# Altium PCB FPv1.3.5.PcbDoc (part 6 of 9)
Units mil, origin at the board's own origin, x right, y up, seen from the top; angles counter-clockwise.
Board outline 3200 x 2100 mil, 4 copper layers (Top Layer, GROUND PLANE, POWER PLANE, Bottom Layer); 98 components, 183 nets, 614 pads, 312 vias.
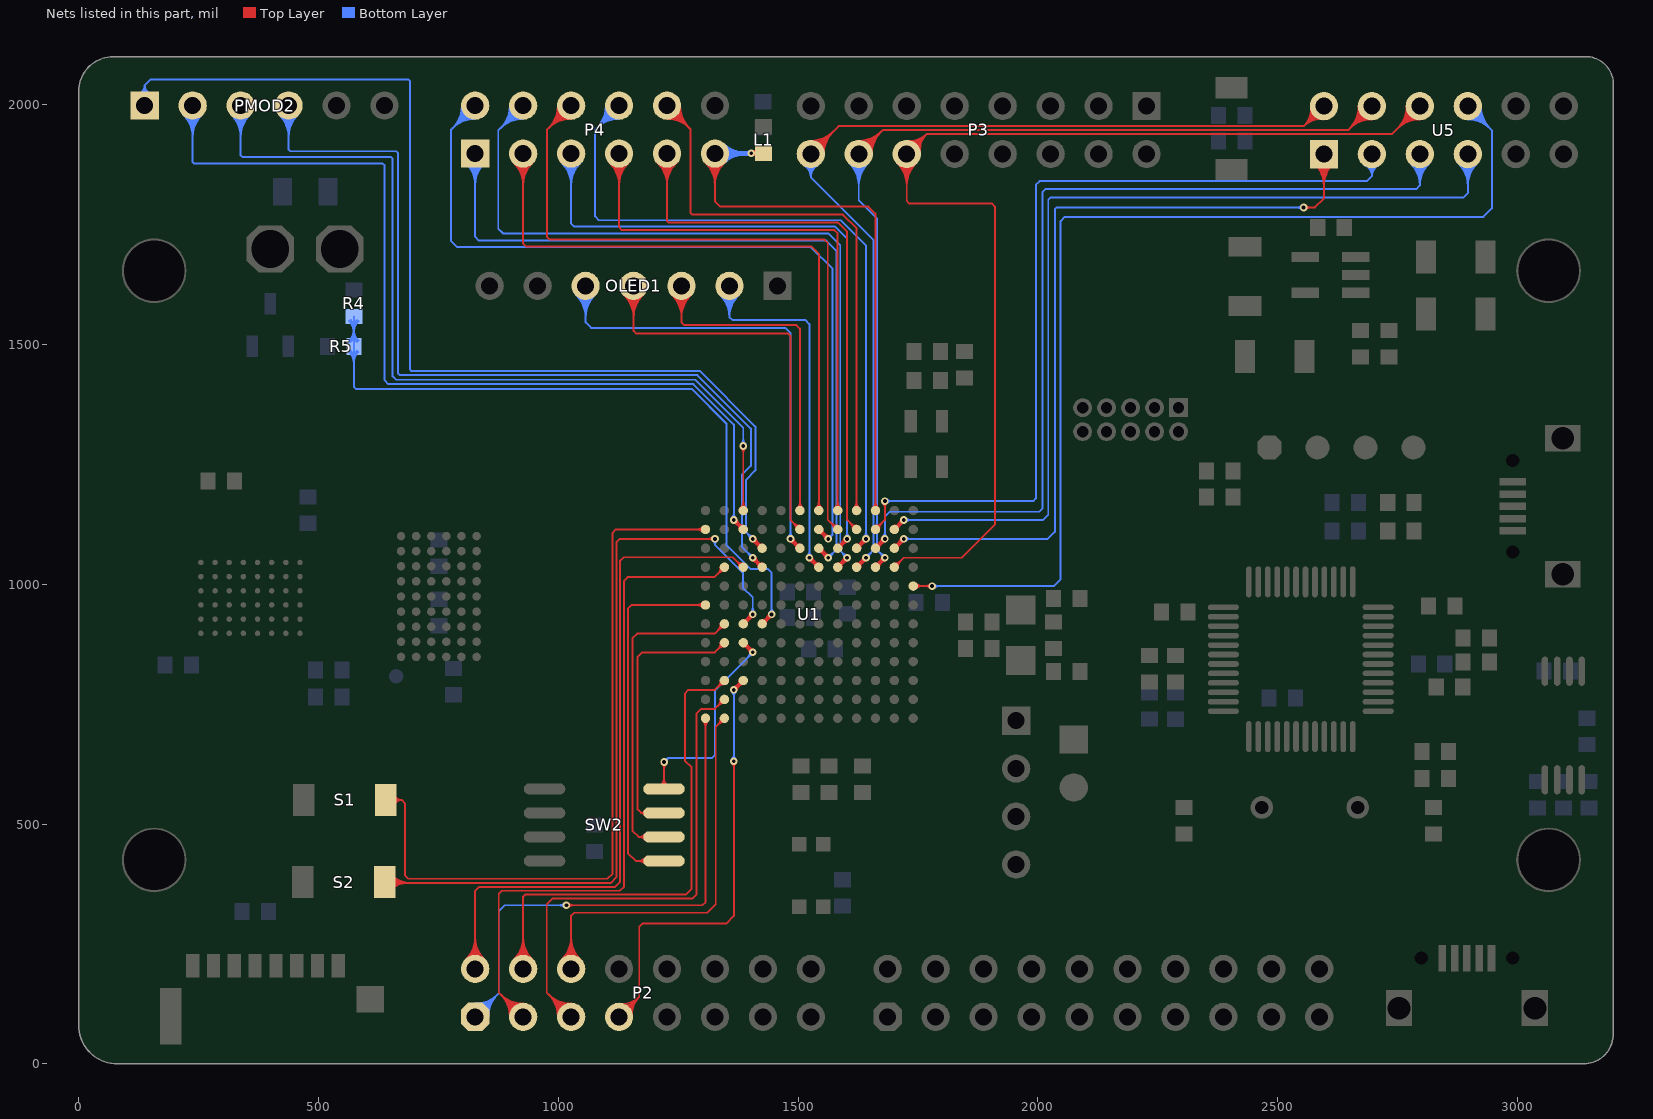
[diagram p8: the nets of this part, all layers, seen from the top]

## Via types
v1: diameter 15.87, hole 7.87, Top Layer to Bottom Layer, tented both sides, 261 vias
v2: diameter 19.8, hole 11.81, Top Layer to Bottom Layer, tented both sides, 25 vias
v3: diameter 23.62, hole 15.75, Top Layer to Bottom Layer, tented both sides, 11 vias
v4: diameter 20, hole 13, Top Layer to Bottom Layer, tented both sides, 5 vias
v5: diameter 27.68, hole 15.75, Top Layer to Bottom Layer, tented both sides, 3 vias
v6: diameter 23.74, hole 15.75, Top Layer to Bottom Layer, tented both sides, 2 vias
v7: diameter 19.8, hole 9.84, Top Layer to Bottom Layer, tented both sides, 2 vias
v8: diameter 23.62, hole 9.45, Top Layer to Bottom Layer, tented both sides, 1 vias
v9: diameter 17.24, hole 9.06, Top Layer to Bottom Layer, tented both sides, 1 vias
v10: diameter 23.74, hole 11.81, Top Layer to Bottom Layer, tented both sides, 1 vias

## Nets (pads, with @x,y where several pads share a name; then routed paths per layer and width w, separated by ;. In a path a pad name is that pad's centre, name@x,y a point inside that pad or via, vN(x,y) a via of type N, cw(c..) or ccw(c..) an arc to the next point about the centre after c; other vN are vias at no path point) (continued)
PTA5: U1.M8 U5.8 | length 2605.6
  Top Layer w4: U1.M8@1740.16,996.06 v1(1779.53,996.06) ; U1.M8@1745.7,990.52 cw(c1759.09,977.13) 1759.09,996.06 cw(c1759.09,1015) U1.M8@1745.7,1001.61 ; v1@1775.33,991.87 ccw(c1765.2,981.74) 1765.2,996.06 ccw(c1765.2,1010.39) v1@1775.33,1000.26
  Bottom Layer w4: v1(1779.53,996.06) 2033.06,996.06 2047.24,1010.24 2047.24,1756.89 2056.1,1765.75 2929.13,1765.75 2946.85,1783.46 2946.85,1946.26 U5.8@2896.46,1996.65 ; v1@1783.72,991.87 cw(c1793.85,981.74) 1793.85,996.06 cw(c1793.85,1010.39) v1@1783.72,1000.26 ; U5.8@2896.46,1969.13 cw(c2896.46,1902.67) 2943.45,1949.66 cw(c2990.44,1996.65) U5.8@2923.98,1996.65 ; U5.8@2896.46,1973.13 cw(c2896.46,1916.33) 2936.62,1956.49 cw(c2976.78,1996.65) U5.8@2919.98,1996.65 ; U5.8@2896.46,1977.13 cw(c2896.46,1929.98) 2929.79,1963.32 cw(c2963.13,1996.65) U5.8@2915.98,1996.65 ; U5.8@2896.46,1981.13 cw(c2896.46,1943.64) 2922.96,1970.15 cw(c2949.47,1996.65) U5.8@2911.98,1996.65
PTA11: P3.12 U1.L9 U5.6 | length 3262.8
  Top Layer w4: U1.L9@1700.79,1035.43 1720.47,1055.12 1841.54,1055.12 1910.43,1124.02 1910.43,1787.4 1904.53,1793.31 1732.28,1793.31 1726.61,1798.98 P3.12@1726.61,1897.05 1768.54,1938.98 2738.78,1938.98 U5.6@2796.46,1996.65 ; U1.L9@1700.79,1043.28 ccw(c1700.79,1062.21) 1714.18,1048.82 ccw(c1727.56,1035.43) U1.L9@1708.63,1035.43 ; P3.12@1707.15,1877.58 cw(c1660.16,1830.59) 1726.61,1830.59 cw(c1793.07,1830.59) P3.12@1746.08,1877.58 ; P3.12@1709.98,1880.41 cw(c1669.81,1840.25) 1726.61,1840.25 cw(c1783.41,1840.25) P3.12@1743.25,1880.41 ; P3.12@1712.81,1883.24 cw(c1679.47,1849.9) 1726.61,1849.9 cw(c1773.76,1849.9) P3.12@1740.42,1883.24 ; P3.12@1715.63,1886.07 cw(c1689.13,1859.56) 1726.61,1859.56 cw(c1764.1,1859.56) P3.12@1737.59,1886.07 ; P3.12@1727.92,1912.52 ccw(c1730.28,1940.68) 1750.26,1920.7 ccw(c1770.24,1900.72) P3.12@1742.09,1898.35 ; P3.12@1728.25,1916.51 ccw(c1731.23,1951.92) 1756.36,1926.79 ccw(c1781.48,1901.66) P3.12@1746.07,1898.68 ; P3.12@1728.59,1920.49 ccw(c1732.17,1963.16) 1762.45,1932.88 ccw(c1792.72,1902.61) P3.12@1750.06,1899.02 ; P3.12@1728.92,1924.48 ccw(c1733.12,1974.4) 1768.54,1938.97 ccw(c1803.96,1903.55) P3.12@1754.04,1899.35 ; U5.6@2768.93,1996.65 cw(c2702.47,1996.65) 2749.46,1949.66 cw(c2796.46,1902.67) U5.6@2796.46,1969.13 ; U5.6@2772.93,1996.65 cw(c2716.13,1996.65) 2756.29,1956.49 cw(c2796.46,1916.33) U5.6@2796.46,1973.13 ; U5.6@2776.93,1996.65 cw(c2729.79,1996.65) 2763.12,1963.32 cw(c2796.46,1929.98) U5.6@2796.46,1977.13 ; U5.6@2780.93,1996.65 cw(c2743.44,1996.65) 2769.95,1970.15 cw(c2796.46,1943.64) U5.6@2796.46,1981.13
PTA12: P3.14 U1.K9 U5.4 | length 3143.7
  Top Layer w4: P3.14@1626.61,1897.05 1676.54,1946.98 2646.78,1946.98 U5.4@2696.46,1996.65 ; P3.14@1626.61,1912.57 ccw(c1626.61,1950.06) 1653.12,1923.55 ccw(c1679.63,1897.05) P3.14@1642.14,1897.05 ; P3.14@1626.61,1916.57 ccw(c1626.61,1963.72) 1659.95,1930.38 ccw(c1693.29,1897.05) P3.14@1646.14,1897.05 ; P3.14@1626.61,1920.57 ccw(c1626.61,1977.38) 1666.78,1937.21 ccw(c1706.94,1897.05) P3.14@1650.14,1897.05 ; P3.14@1626.61,1924.57 ccw(c1626.61,1991.03) 1673.61,1944.04 ccw(c1720.6,1897.05) P3.14@1654.14,1897.05 ; U1.K9@1661.42,1035.43 v1(1681.1,1055.12) ; U1.K9@1661.42,1043.28 ccw(c1661.42,1062.21) 1674.81,1048.82 ccw(c1688.19,1035.43) U1.K9@1669.26,1035.43 ; U1.K9@1665.17,1043.26 ccw(c1654.26,1062.15) v1@1675.36,1056.62 ; U1.K9@1669.24,1039.18 cw(c1688.14,1028.27) v1@1682.61,1049.38 ; 1673.46,1048.05 ccw(c1667.29,1058.74) v1@1679.23,1055.61 ; 1673.65,1048.16 ccw(c1671.57,1051.77) v1@1675.5,1053.15 ; 1674.03,1047.48 cw(c1684.72,1041.31) v1@1681.59,1053.25 ; 1674.14,1047.67 cw(c1677.75,1045.58) v1@1679.14,1049.52 ; v1@1675.17,1055.12 cw(c1660.85,1055.12) 1670.97,1044.99 cw(c1681.1,1034.86) v1@1681.1,1049.19 ; U5.4@2668.93,1996.65 cw(c2602.47,1996.65) 2649.46,1949.66 cw(c2696.46,1902.67) U5.4@2696.46,1969.13 ; U5.4@2672.93,1996.65 cw(c2616.13,1996.65) 2656.29,1956.49 cw(c2696.46,1916.33) U5.4@2696.46,1973.13 ; U5.4@2676.93,1996.65 cw(c2629.79,1996.65) 2663.12,1963.32 cw(c2696.46,1929.98) U5.4@2696.46,1977.13 ; U5.4@2680.93,1996.65 cw(c2643.44,1996.65) 2669.95,1970.15 cw(c2696.46,1943.64) U5.4@2696.46,1981.13 ; 1674.67,1048.74 cw(c1677.9,1043.15) 1679.57,1049.39 ccw(c1677.9,1043.15) 1674.67,1048.74 ; 1674.73,1048.68 ccw(c1669.14,1051.91) 1675.37,1053.58 cw(c1669.14,1051.91) 1674.73,1048.68
  Bottom Layer w4: P3.14@1607.15,1877.58 cw(c1560.16,1830.59) 1626.61,1830.59 cw(c1693.07,1830.59) P3.14@1646.08,1877.58 ; P3.14@1609.98,1880.41 cw(c1569.81,1840.25) 1626.61,1840.25 cw(c1683.41,1840.25) P3.14@1643.25,1880.41 ; P3.14@1612.81,1883.24 cw(c1579.47,1849.9) 1626.61,1849.9 cw(c1673.76,1849.9) P3.14@1640.42,1883.24 ; P3.14@1615.63,1886.07 cw(c1589.13,1859.56) 1626.61,1859.56 cw(c1664.1,1859.56) P3.14@1637.59,1886.07 ; P3.14@1626.61,1897.05 1626.61,1800.2 1665,1761.81 1665,1071.22 v1(1681.1,1055.12) ; v1@1675.17,1055.12 ccw(c1660.85,1055.12) 1670.97,1065.25 ccw(c1681.1,1075.37) v1@1681.1,1061.05
PTA13: P3.16 U1.J9 U5.2 | length 2952.5
  Top Layer w4: P3.16@1526.61,1897.05 1584.54,1954.98 2554.78,1954.98 ; P3.16@1526.61,1912.57 ccw(c1526.61,1950.06) 1553.12,1923.55 ccw(c1579.63,1897.05) P3.16@1542.14,1897.05 ; P3.16@1526.61,1916.57 ccw(c1526.61,1963.72) 1559.95,1930.38 ccw(c1593.29,1897.05) P3.16@1546.14,1897.05 ; P3.16@1526.61,1920.57 ccw(c1526.61,1977.38) 1566.78,1937.21 ccw(c1606.94,1897.05) P3.16@1550.14,1897.05 ; P3.16@1526.61,1924.57 ccw(c1526.61,1991.03) 1573.61,1944.04 ccw(c1620.6,1897.05) P3.16@1554.14,1897.05 ; U1.J9@1622.05,1035.43 v1(1641.73,1055.12) ; U1.J9@1622.05,1043.28 ccw(c1622.05,1062.21) 1635.44,1048.82 ccw(c1648.82,1035.43) U1.J9@1629.89,1035.43 ; U1.J9@1625.8,1043.26 ccw(c1614.89,1062.15) v1@1635.99,1056.62 ; U1.J9@1629.87,1039.18 cw(c1648.77,1028.27) v1@1643.24,1049.38 ; 1634.09,1048.05 ccw(c1627.92,1058.74) v1@1639.86,1055.61 ; 1634.28,1048.16 ccw(c1632.2,1051.77) v1@1636.13,1053.15 ; 1634.66,1047.48 cw(c1645.35,1041.31) v1@1642.22,1053.25 ; 1634.77,1047.67 cw(c1638.38,1045.58) v1@1639.77,1049.52 ; v1@1635.8,1055.12 cw(c1621.48,1055.12) 1631.6,1044.99 cw(c1641.73,1034.86) v1@1641.73,1049.19 ; U5.2@2569.04,1994.22 cw(c2519.9,1989.86) 2554.78,1954.98 ; U5.2@2573.02,1994.57 cw(c2531.02,1990.85) 2560.84,1961.03 cw(c2590.65,1931.22) U5.2@2594.38,1973.22 ; U5.2@2577.01,1994.93 cw(c2542.15,1991.83) 2566.89,1967.09 cw(c2591.64,1942.35) U5.2@2594.73,1977.2 ; U5.2@2580.99,1995.28 cw(c2553.27,1992.82) 2572.95,1973.15 cw(c2592.62,1953.47) U5.2@2595.08,1981.19 ; U5.2@2594.02,1969.23 ccw(c2589.66,1920.1) 2554.78,1954.98 ; U5.2@2596.46,1996.65 2554.78,1954.98 ; 1635.3,1048.74 cw(c1638.53,1043.15) 1640.2,1049.39 ccw(c1638.53,1043.15) 1635.3,1048.74 ; 1635.36,1048.68 ccw(c1629.77,1051.91) 1636,1053.58 cw(c1629.77,1051.91) 1635.36,1048.68
  Bottom Layer w4: P3.16@1512.43,1873.45 cw(c1497.37,1848.39) 1526.61,1848.39 ; P3.16@1514.49,1876.88 cw(c1501.62,1855.46) 1526.61,1855.46 cw(c1551.61,1855.46) P3.16@1538.73,1876.88 ; P3.16@1516.56,1880.31 cw(c1505.87,1862.53) 1526.61,1862.53 cw(c1547.36,1862.53) P3.16@1536.67,1880.31 ; P3.16@1526.61,1897.05 1526.61,1848.39 ; P3.16@1540.79,1873.45 ccw(c1555.86,1848.39) 1526.61,1848.39 ; v1(1641.73,1055.12) 1657,1070.39 1657,1718 1526.61,1848.39 ; v1@1641.73,1061.05 ccw(c1641.73,1075.37) 1651.86,1065.25 ccw(c1661.99,1055.12) v1@1647.67,1055.12
PTA14: U1.L10 U5.1 | length 2216.2
  Top Layer w4: U1.L10@1700.79,1074.8 v1(1720.47,1094.49) ; U1.L10@1700.79,1082.65 ccw(c1700.79,1101.58) 1714.18,1088.19 ccw(c1727.56,1074.8) U1.L10@1708.63,1074.8 ; U1.L10@1704.54,1082.63 ccw(c1693.63,1101.52) v1@1714.73,1095.99 ; U1.L10@1708.61,1078.55 cw(c1727.51,1067.64) v1@1721.98,1088.75 ; 1712.83,1087.42 ccw(c1706.66,1098.11) v1@1718.6,1094.98 ; 1713.02,1087.53 ccw(c1710.94,1091.14) v1@1714.87,1092.52 ; 1713.4,1086.85 cw(c1724.09,1080.68) v1@1720.96,1092.62 ; 1713.51,1087.04 cw(c1717.12,1084.95) v1@1718.51,1088.89 ; v1@1714.54,1094.49 cw(c1700.22,1094.49) 1710.34,1084.36 cw(c1720.47,1074.23) v1@1720.47,1088.56 ; v1(2554.13,1785.43) 2577.76,1785.43 2596.46,1804.13 U5.1@2596.46,1896.65 ; v1@2558.33,1781.24 cw(c2568.46,1771.11) 2568.46,1785.43 cw(c2568.46,1799.76) v1@2558.33,1789.63 ; U5.1@2576.99,1877.19 cw(c2530,1830.2) 2596.46,1830.2 cw(c2662.91,1830.2) U5.1@2615.92,1877.19 ; U5.1@2579.82,1880.02 cw(c2539.66,1839.85) 2596.46,1839.85 cw(c2653.26,1839.85) U5.1@2613.09,1880.02 ; U5.1@2582.65,1882.85 cw(c2549.31,1849.51) 2596.46,1849.51 cw(c2643.6,1849.51) U5.1@2610.26,1882.85 ; U5.1@2585.48,1885.67 cw(c2558.97,1859.17) 2596.46,1859.17 cw(c2633.94,1859.17) U5.1@2607.44,1885.67 ; 1714.04,1088.11 cw(c1717.27,1082.52) 1718.94,1088.76 ccw(c1717.27,1082.52) 1714.04,1088.11 ; 1714.1,1088.06 ccw(c1708.51,1091.28) 1714.74,1092.95 cw(c1708.51,1091.28) 1714.1,1088.06
  Bottom Layer w4: v1(1720.47,1094.49) 2020.67,1094.49 2035.43,1109.25 2035.43,1781.43 2039.43,1785.43 v1(2554.13,1785.43) ; v1@1724.67,1090.29 cw(c1734.8,1080.16) 1734.8,1094.49 cw(c1734.8,1108.81) v1@1724.67,1098.68 ; v1@2549.94,1781.24 ccw(c2539.81,1771.11) 2539.81,1785.43 ccw(c2539.81,1799.76) v1@2549.94,1789.63
PTA15: U1.L11 U5.7 | length 2439.4
  Top Layer w4: U1.L11@1700.79,1114.17 v1(1720.47,1133.86) ; U1.L11@1700.79,1122.02 ccw(c1700.79,1140.95) 1714.18,1127.56 ccw(c1727.56,1114.17) U1.L11@1708.63,1114.17 ; U1.L11@1704.54,1122 ccw(c1693.63,1140.89) v1@1714.73,1135.36 ; U1.L11@1708.61,1117.92 cw(c1727.51,1107.01) v1@1721.98,1128.12 ; 1712.83,1126.79 ccw(c1706.66,1137.48) v1@1718.6,1134.35 ; 1713.02,1126.9 ccw(c1710.94,1130.51) v1@1714.87,1131.89 ; 1713.4,1126.22 cw(c1724.09,1120.05) v1@1720.96,1131.99 ; 1713.51,1126.41 cw(c1717.12,1124.32) v1@1718.51,1128.26 ; v1@1714.54,1133.86 cw(c1700.22,1133.86) 1710.34,1123.73 cw(c1720.47,1113.6) v1@1720.47,1127.93 ; 1714.04,1127.48 cw(c1717.27,1121.89) 1718.94,1128.13 ccw(c1717.27,1121.89) 1714.04,1127.48 ; 1714.1,1127.43 ccw(c1708.51,1130.65) 1714.74,1132.32 cw(c1708.51,1130.65) 1714.1,1127.43
  Bottom Layer w4: v1(1720.47,1133.86) 2010.86,1133.86 2021.65,1144.65 2021.65,1801.65 2026.1,1806.1 2887.1,1806.1 2896.46,1815.46 U5.7@2896.46,1896.65 ; v1@1724.67,1129.66 cw(c1734.8,1119.53) 1734.8,1133.86 cw(c1734.8,1148.18) v1@1724.67,1138.05 ; U5.7@2876.99,1877.19 cw(c2830,1830.2) 2896.46,1830.2 cw(c2962.91,1830.2) U5.7@2915.92,1877.19 ; U5.7@2879.82,1880.02 cw(c2839.66,1839.85) 2896.46,1839.85 cw(c2953.26,1839.85) U5.7@2913.09,1880.02 ; U5.7@2882.65,1882.85 cw(c2849.31,1849.51) 2896.46,1849.51 cw(c2943.6,1849.51) U5.7@2910.26,1882.85 ; U5.7@2885.48,1885.67 cw(c2858.97,1859.17) 2896.46,1859.17 cw(c2933.94,1859.17) U5.7@2907.44,1885.67
PTA16: U1.K10 U5.5 | length 2405.3
  Top Layer w4: U1.K10@1661.42,1074.8 v1(1681.1,1094.49) ; U1.K10@1661.42,1082.65 ccw(c1661.42,1101.58) 1674.81,1088.19 ccw(c1688.19,1074.8) U1.K10@1669.26,1074.8 ; U1.K10@1665.17,1082.63 ccw(c1654.26,1101.52) v1@1675.36,1095.99 ; U1.K10@1669.24,1078.55 cw(c1688.14,1067.64) v1@1682.61,1088.75 ; 1673.46,1087.42 ccw(c1667.29,1098.11) v1@1679.23,1094.98 ; 1673.65,1087.53 ccw(c1671.57,1091.14) v1@1675.5,1092.52 ; 1674.03,1086.85 cw(c1684.72,1080.68) v1@1681.59,1092.62 ; 1674.14,1087.04 cw(c1677.75,1084.95) v1@1679.14,1088.89 ; v1@1675.17,1094.49 cw(c1660.85,1094.49) 1670.97,1084.36 cw(c1681.1,1074.23) v1@1681.1,1088.56 ; 1674.67,1088.11 cw(c1677.9,1082.52) 1679.57,1088.76 ccw(c1677.9,1082.52) 1674.67,1088.11 ; 1674.73,1088.06 ccw(c1669.14,1091.28) 1675.37,1092.95 cw(c1669.14,1091.28) 1674.73,1088.06
  Bottom Layer w4: v1@1676.91,1098.68 ccw(c1666.78,1108.81) 1681.1,1108.81 ccw(c1695.43,1108.81) v1@1685.3,1098.68 ; v1(1681.1,1094.49) 1681.1,1141.1 1691,1151 2003,1151 2010,1158 2010,1818 2015.82,1823.82 2788.82,1823.82 2796.46,1831.46 ; U5.5@2777.26,1876.92 cw(c2733.02,1831.46) 2796.46,1831.46 ; U5.5@2780.05,1879.79 cw(c2742.24,1840.93) 2796.46,1840.93 cw(c2850.67,1840.93) U5.5@2812.86,1879.79 ; U5.5@2782.84,1882.66 cw(c2751.46,1850.41) 2796.46,1850.41 cw(c2841.46,1850.41) U5.5@2810.07,1882.66 ; U5.5@2785.63,1885.52 cw(c2760.67,1859.88) 2796.46,1859.88 cw(c2832.24,1859.88) U5.5@2807.29,1885.52 ; U5.5@2796.46,1896.65 2796.46,1831.46 ; U5.5@2815.65,1876.92 ccw(c2859.89,1831.46) 2796.46,1831.46
PTA17: U1.K11 U5.3 | length 2001
  Top Layer w4: U1.K11@1661.42,1114.17 1681.1,1133.86 v1(1681.1,1173.23) ; U1.K11@1661.42,1122.02 ccw(c1661.42,1140.95) 1674.81,1127.56 ccw(c1688.19,1114.17) U1.K11@1669.26,1114.17 ; v1@1676.91,1169.03 cw(c1666.78,1158.9) 1681.1,1158.9 cw(c1695.43,1158.9) v1@1685.3,1169.03
  Bottom Layer w4: v1(1681.1,1173.23) 1990.23,1173.23 1996.06,1179.06 1996.06,1833.06 2003.55,1840.55 2686.02,1840.55 2696.46,1850.98 ; v1@1685.3,1169.03 cw(c1695.43,1158.9) 1695.43,1173.23 cw(c1695.43,1187.55) v1@1685.3,1177.42 ; U5.3@2683.6,1872.31 cw(c2672.34,1850.99) 2696.46,1850.99 ; U5.3@2685.47,1875.85 cw(c2675.84,1857.62) 2696.46,1857.62 cw(c2717.07,1857.62) U5.3@2707.44,1875.85 ; U5.3@2687.34,1879.39 cw(c2679.35,1864.26) 2696.46,1864.26 cw(c2713.56,1864.26) U5.3@2705.58,1879.39 ; U5.3@2696.46,1896.65 2696.46,1850.98 ; U5.3@2709.31,1872.31 ccw(c2720.57,1850.99) 2696.46,1850.99
PTA24: L1.1 P4.11 U1.K12 | length 1711.7
  Top Layer w4: P4.11@1307.35,1878.37 cw(c1260.35,1831.38) 1326.81,1831.38 cw(c1393.27,1831.38) P4.11@1346.28,1878.37 ; P4.11@1310.17,1881.2 cw(c1270.01,1841.03) 1326.81,1841.03 cw(c1383.61,1841.03) P4.11@1343.45,1881.2 ; P4.11@1313,1884.03 cw(c1279.67,1850.69) 1326.81,1850.69 cw(c1373.95,1850.69) P4.11@1340.62,1884.03 ; P4.11@1315.83,1886.85 cw(c1289.32,1860.35) 1326.81,1860.35 cw(c1364.3,1860.35) P4.11@1337.79,1886.85 ; P4.11@1326.81,1897.83 1326.81,1798.19 1337.6,1787.4 1646.65,1787.4 1661.42,1772.64 U1.K12@1661.42,1153.54 ; U1.K12@1655.87,1159.09 ccw(c1642.48,1172.48) 1661.42,1172.48 ccw(c1680.35,1172.48) U1.K12@1666.96,1159.09
  Top Layer w10: L1.1@1418.08,1891.56 ccw(c1402.56,1878.04) v1(1402.56,1898.62) ; L1.1@1418.08,1905.68 cw(c1402.56,1919.2) v1(1402.56,1898.62) ; L1.1@1428.15,1898.62 v1(1402.56,1898.62)
  Bottom Layer w10: P4.11@1326.81,1897.83 v1@1401.77,1897.83 ; P4.11@1337.08,1887.56 cw(c1361.88,1862.76) 1361.88,1897.83 cw(c1361.88,1932.91) P4.11@1337.08,1908.11 ; P4.11@1344.15,1880.49 cw(c1386.02,1838.62) 1386.02,1897.83 cw(c1386.02,1957.05) P4.11@1344.15,1915.18 ; 1393.58,1897.83 ccw(c1393.58,1907.61) v1@1400.49,1900.7
PTA25: P4.10 U1.J12 | length 1548.2
  Top Layer w4: P4.10@1226.81,1970.31 cw(c1226.81,1903.85) 1273.8,1950.84 cw(c1320.8,1997.83) P4.10@1254.34,1997.83 ; P4.10@1226.81,1974.31 cw(c1226.81,1917.51) 1266.97,1957.67 cw(c1307.14,1997.83) P4.10@1250.34,1997.83 ; P4.10@1226.81,1978.31 cw(c1226.81,1931.16) 1260.15,1964.5 cw(c1293.48,1997.83) P4.10@1246.34,1997.83 ; P4.10@1226.81,1982.31 cw(c1226.81,1944.82) 1253.32,1971.33 cw(c1279.82,1997.83) P4.10@1242.34,1997.83 ; P4.10@1226.81,1997.83 1275.59,1949.05 1275.59,1774.61 1279.53,1770.67 1593.5,1770.67 1622.05,1742.13 U1.J12@1622.05,1153.54 ; U1.J12@1616.5,1159.09 ccw(c1603.11,1172.48) 1622.05,1172.48 ccw(c1640.98,1172.48) U1.J12@1627.59,1159.09
PTA26: P4.9 U1.J11 | length 1510.8
  Top Layer w4: P4.9@1207.35,1878.37 cw(c1160.35,1831.38) 1226.81,1831.38 cw(c1293.27,1831.38) P4.9@1246.28,1878.37 ; P4.9@1210.17,1881.2 cw(c1170.01,1841.03) 1226.81,1841.03 cw(c1283.61,1841.03) P4.9@1243.45,1881.2 ; P4.9@1213,1884.03 cw(c1179.67,1850.69) 1226.81,1850.69 cw(c1273.95,1850.69) P4.9@1240.62,1884.03 ; P4.9@1215.83,1886.85 cw(c1189.32,1860.35) 1226.81,1860.35 cw(c1264.3,1860.35) P4.9@1237.79,1886.85 ; P4.9@1226.81,1897.83 1226.81,1757.19 1230.06,1753.94 1583.66,1753.94 1602.36,1735.24 1602.36,1133.86 U1.J11@1622.05,1114.17 ; U1.J11@1614.2,1114.17 ccw(c1595.27,1114.17) 1608.66,1127.56 ccw(c1622.05,1140.95) U1.J11@1622.05,1122.02
PTA27: P4.8 U1.J10 | length 1968.3
  Top Layer w4: U1.J10@1622.05,1074.8 v1(1641.73,1094.49) ; U1.J10@1622.05,1082.65 ccw(c1622.05,1101.58) 1635.44,1088.19 ccw(c1648.82,1074.8) U1.J10@1629.89,1074.8 ; U1.J10@1625.8,1082.63 ccw(c1614.89,1101.52) v1@1635.99,1095.99 ; U1.J10@1629.87,1078.55 cw(c1648.77,1067.64) v1@1643.24,1088.75 ; 1634.09,1087.42 ccw(c1627.92,1098.11) v1@1639.86,1094.98 ; 1634.28,1087.53 ccw(c1632.2,1091.14) v1@1636.13,1092.52 ; 1634.66,1086.85 cw(c1645.35,1080.68) v1@1642.22,1092.62 ; 1634.77,1087.04 cw(c1638.38,1084.95) v1@1639.77,1088.89 ; v1@1635.8,1094.49 cw(c1621.48,1094.49) 1631.6,1084.36 cw(c1641.73,1074.23) v1@1641.73,1088.56 ; 1635.3,1088.11 cw(c1638.53,1082.52) 1640.2,1088.76 ccw(c1638.53,1082.52) 1635.3,1088.11 ; 1635.36,1088.06 ccw(c1629.77,1091.28) 1636,1092.95 cw(c1629.77,1091.28) 1635.36,1088.06
  Bottom Layer w4: P4.8@1099.28,1997.83 cw(c1032.83,1997.83) 1079.82,1950.84 cw(c1126.81,1903.85) P4.8@1126.81,1970.31 ; P4.8@1103.28,1997.83 cw(c1046.48,1997.83) 1086.65,1957.67 cw(c1126.81,1917.51) P4.8@1126.81,1974.31 ; P4.8@1107.28,1997.83 cw(c1060.14,1997.83) 1093.47,1964.5 cw(c1126.81,1931.16) P4.8@1126.81,1978.31 ; P4.8@1111.28,1997.83 cw(c1073.8,1997.83) 1100.3,1971.33 cw(c1126.81,1944.82) P4.8@1126.81,1982.31 ; P4.8@1126.81,1997.83 1076.77,1947.8 1076.77,1766.73 1084.65,1758.86 1588.58,1758.86 1641.73,1705.71 v1(1641.73,1094.49) ; v1@1637.54,1098.68 ccw(c1627.41,1108.81) 1641.73,1108.81 ccw(c1656.06,1108.81) v1@1645.93,1098.68
PTA28: P4.7 U1.H12 | length 1548.9
  Top Layer w4: P4.7@1107.35,1878.37 cw(c1060.35,1831.38) 1126.81,1831.38 cw(c1193.27,1831.38) P4.7@1146.28,1878.37 ; P4.7@1110.17,1881.2 cw(c1070.01,1841.03) 1126.81,1841.03 cw(c1183.61,1841.03) P4.7@1143.45,1881.2 ; P4.7@1113,1884.03 cw(c1079.67,1850.69) 1126.81,1850.69 cw(c1173.95,1850.69) P4.7@1140.62,1884.03 ; P4.7@1115.83,1886.85 cw(c1089.32,1860.35) 1126.81,1860.35 cw(c1164.3,1860.35) P4.7@1137.79,1886.85 ; P4.7@1126.81,1897.83 1126.81,1744.25 1132.87,1738.19 1575.79,1738.19 1582.68,1731.3 U1.H12@1582.68,1153.54 ; U1.H12@1577.13,1159.09 ccw(c1563.74,1172.48) 1582.68,1172.48 ccw(c1601.61,1172.48) U1.H12@1588.22,1159.09
PTA29: P4.6 U1.H11 | length 1847.4
  Top Layer w4: P4.6@999.28,1997.83 cw(c932.83,1997.83) 979.82,1950.84 cw(c1026.81,1903.85) P4.6@1026.81,1970.31 ; P4.6@1003.28,1997.83 cw(c946.48,1997.83) 986.65,1957.67 cw(c1026.81,1917.51) P4.6@1026.81,1974.31 ; P4.6@1007.28,1997.83 cw(c960.14,1997.83) 993.47,1964.5 cw(c1026.81,1931.16) P4.6@1026.81,1978.31 ; P4.6@1011.28,1997.83 cw(c973.8,1997.83) 1000.3,1971.33 cw(c1026.81,1944.82) P4.6@1026.81,1982.31 ; P4.6@1026.81,1997.83 976.38,1947.4 976.38,1724.62 982.5,1718.5 1555.12,1718.5 1562.01,1711.61 1562.01,1134.84 U1.H11@1582.68,1114.17 ; U1.H11@1574.83,1114.17 ccw(c1555.9,1114.17) 1569.29,1127.56 ccw(c1582.68,1140.95) U1.H11@1582.68,1122.02
PTB0: P4.5 U1.H10 | length 1875.6
  Top Layer w4: U1.H10@1582.68,1074.8 v1(1602.36,1094.49) ; U1.H10@1582.68,1082.65 ccw(c1582.68,1101.58) 1596.07,1088.19 ccw(c1609.45,1074.8) U1.H10@1590.52,1074.8 ; U1.H10@1586.43,1082.63 ccw(c1575.52,1101.52) v1@1596.62,1095.99 ; U1.H10@1590.5,1078.55 cw(c1609.4,1067.64) v1@1603.87,1088.75 ; 1594.72,1087.42 ccw(c1588.55,1098.11) v1@1600.49,1094.98 ; 1594.91,1087.53 ccw(c1592.83,1091.14) v1@1596.76,1092.52 ; 1595.29,1086.85 cw(c1605.98,1080.68) v1@1602.85,1092.62 ; 1595.4,1087.04 cw(c1599.01,1084.95) v1@1600.4,1088.89 ; v1@1596.43,1094.49 cw(c1582.11,1094.49) 1592.23,1084.36 cw(c1602.36,1074.23) v1@1602.36,1088.56 ; 1595.93,1088.11 cw(c1599.16,1082.52) 1600.83,1088.76 ccw(c1599.16,1082.52) 1595.93,1088.11 ; 1595.99,1088.06 ccw(c1590.4,1091.28) 1596.63,1092.95 cw(c1590.4,1091.28) 1595.99,1088.06
  Bottom Layer w4: P4.5@1007.35,1878.37 cw(c960.35,1831.38) 1026.81,1831.38 cw(c1093.27,1831.38) P4.5@1046.28,1878.37 ; P4.5@1010.17,1881.2 cw(c970.01,1841.03) 1026.81,1841.03 cw(c1083.61,1841.03) P4.5@1043.45,1881.2 ; P4.5@1013,1884.03 cw(c979.67,1850.69) 1026.81,1850.69 cw(c1073.95,1850.69) P4.5@1040.62,1884.03 ; P4.5@1015.83,1886.85 cw(c989.32,1860.35) 1026.81,1860.35 cw(c1064.3,1860.35) P4.5@1037.79,1886.85 ; P4.5@1026.81,1897.83 1026.81,1751.73 1032.48,1746.06 1576.77,1746.06 1602.36,1720.47 v1(1602.36,1094.49) ; v1@1598.17,1098.68 ccw(c1588.04,1108.81) 1602.36,1108.81 ccw(c1616.69,1108.81) v1@1606.56,1098.68
PTB1: P4.4 U1.H9 | length 2177.7
  Top Layer w4: U1.H9@1582.68,1035.43 v1(1602.36,1055.12) ; U1.H9@1582.68,1043.28 ccw(c1582.68,1062.21) 1596.07,1048.82 ccw(c1609.45,1035.43) U1.H9@1590.52,1035.43 ; U1.H9@1586.43,1043.26 ccw(c1575.52,1062.15) v1@1596.62,1056.62 ; U1.H9@1590.5,1039.18 cw(c1609.4,1028.27) v1@1603.87,1049.38 ; 1594.72,1048.05 ccw(c1588.55,1058.74) v1@1600.49,1055.61 ; 1594.91,1048.16 ccw(c1592.83,1051.77) v1@1596.76,1053.15 ; 1595.29,1047.48 cw(c1605.98,1041.31) v1@1602.85,1053.25 ; 1595.4,1047.67 cw(c1599.01,1045.58) v1@1600.4,1049.52 ; v1@1596.43,1055.12 cw(c1582.11,1055.12) 1592.23,1044.99 cw(c1602.36,1034.86) v1@1602.36,1049.19 ; 1595.93,1048.74 cw(c1599.16,1043.15) 1600.83,1049.39 ccw(c1599.16,1043.15) 1595.93,1048.74 ; 1595.99,1048.68 ccw(c1590.4,1051.91) 1596.63,1053.58 cw(c1590.4,1051.91) 1595.99,1048.68
  Bottom Layer w4: P4.4@899.28,1997.83 cw(c832.83,1997.83) 879.82,1950.84 cw(c926.81,1903.85) P4.4@926.81,1970.31 ; P4.4@903.28,1997.83 cw(c846.48,1997.83) 886.65,1957.67 cw(c926.81,1917.51) P4.4@926.81,1974.31 ; P4.4@907.28,1997.83 cw(c860.14,1997.83) 893.47,1964.5 cw(c926.81,1931.16) P4.4@926.81,1978.31 ; P4.4@911.28,1997.83 cw(c873.8,1997.83) 900.3,1971.33 cw(c926.81,1944.82) P4.4@926.81,1982.31 ; P4.4@926.81,1997.83 875,1946.02 875,1741.14 884.84,1731.3 1562.99,1731.3 1588,1706.29 1588,1069.48 v1(1602.36,1055.12) ; v1@1596.43,1055.12 ccw(c1582.11,1055.12) 1592.23,1065.25 ccw(c1602.36,1075.37) v1@1602.36,1061.05
PTB2: P4.3 U1.G12 | length 1704.7
  Top Layer w4: P4.3@907.35,1878.37 cw(c860.35,1831.38) 926.81,1831.38 cw(c993.27,1831.38) P4.3@946.28,1878.37 ; P4.3@910.17,1881.2 cw(c870.01,1841.03) 926.81,1841.03 cw(c983.61,1841.03) P4.3@943.45,1881.2 ; P4.3@913,1884.03 cw(c879.67,1850.69) 926.81,1850.69 cw(c973.95,1850.69) P4.3@940.62,1884.03 ; P4.3@915.83,1886.85 cw(c889.32,1860.35) 926.81,1860.35 cw(c964.3,1860.35) P4.3@937.79,1886.85 ; P4.3@926.81,1897.83 926.81,1710.19 933.26,1703.74 1528.54,1703.74 1543.31,1688.98 U1.G12@1543.31,1153.54 ; U1.G12@1537.76,1159.09 ccw(c1524.37,1172.48) 1543.31,1172.48 ccw(c1562.24,1172.48) U1.G12@1548.85,1159.09
PTB3: P4.2 U1.G11 | length 2200.4
  Top Layer w4: U1.G11@1543.31,1106.33 cw(c1543.31,1087.4) 1556.7,1100.79 cw(c1570.08,1114.17) U1.G11@1551.15,1114.17 ; U1.G11@1543.31,1114.17 v1(1562.99,1094.49) ; U1.G11@1547.06,1106.35 cw(c1536.15,1087.46) v1@1557.25,1092.98 ; U1.G11@1551.13,1110.42 ccw(c1570.03,1121.33) v1@1564.5,1100.23 ; 1555.35,1101.56 cw(c1549.18,1090.87) v1@1561.12,1094 ; 1555.54,1101.45 cw(c1553.46,1097.84) v1@1557.39,1096.45 ; 1555.92,1102.13 ccw(c1566.61,1108.3) v1@1563.48,1096.36 ; 1556.03,1101.94 ccw(c1559.64,1104.02) v1@1561.03,1100.09 ; v1@1557.06,1094.49 ccw(c1542.74,1094.49) 1552.86,1104.62 ccw(c1562.99,1114.74) v1@1562.99,1100.42 ; 1556.56,1100.86 ccw(c1559.79,1106.45) 1561.46,1100.22 cw(c1559.79,1106.45) 1556.56,1100.86 ; 1556.62,1100.92 cw(c1551.03,1097.69) 1557.26,1096.02 ccw(c1551.03,1097.69) 1556.62,1100.92
  Bottom Layer w4: P4.2@799.28,1997.83 cw(c732.83,1997.83) 779.82,1950.84 cw(c826.81,1903.85) P4.2@826.81,1970.31 ; P4.2@803.28,1997.83 cw(c746.48,1997.83) 786.65,1957.67 cw(c826.81,1917.51) P4.2@826.81,1974.31 ; P4.2@807.28,1997.83 cw(c760.14,1997.83) 793.47,1964.5 cw(c826.81,1931.16) P4.2@826.81,1978.31 ; P4.2@811.28,1997.83 cw(c773.8,1997.83) 800.3,1971.33 cw(c826.81,1944.82) P4.2@826.81,1982.31 ; P4.2@826.81,1997.83 776.57,1947.6 776.57,1715.55 789.37,1702.76 1526.57,1702.76 1572,1657.33 1572,1103.5 ; v1(1562.99,1094.49) 1572,1103.5 ; v1@1563.5,1100.4 ccw(c1564.43,1111.07) 1572,1103.5 ; v1@1568.9,1095 cw(c1579.57,1095.92) 1572,1103.5
PTB4: P4.1 U1.G10 | length 2101.1
  Top Layer w4: U1.G10@1543.31,1066.96 cw(c1543.31,1048.03) 1556.7,1061.42 cw(c1570.08,1074.8) U1.G10@1551.15,1074.8 ; U1.G10@1543.31,1074.8 v1(1562.99,1055.12) ; U1.G10@1547.06,1066.98 cw(c1536.15,1048.09) v1@1557.25,1053.61 ; U1.G10@1551.13,1071.05 ccw(c1570.03,1081.96) v1@1564.5,1060.86 ; 1555.35,1062.19 cw(c1549.18,1051.5) v1@1561.12,1054.63 ; 1555.54,1062.08 cw(c1553.46,1058.47) v1@1557.39,1057.08 ; 1555.92,1062.76 ccw(c1566.61,1068.93) v1@1563.48,1056.99 ; 1556.03,1062.57 ccw(c1559.64,1064.65) v1@1561.03,1060.72 ; v1@1557.06,1055.12 ccw(c1542.74,1055.12) 1552.86,1065.25 ccw(c1562.99,1075.37) v1@1562.99,1061.05 ; 1556.56,1061.49 ccw(c1559.79,1067.08) 1561.46,1060.85 cw(c1559.79,1067.08) 1556.56,1061.49 ; 1556.62,1061.55 cw(c1551.03,1058.32) 1557.26,1056.65 ccw(c1551.03,1058.32) 1556.62,1061.55
  Bottom Layer w4: P4.1@807.35,1878.37 cw(c760.35,1831.38) 826.81,1831.38 cw(c893.27,1831.38) P4.1@846.28,1878.37 ; P4.1@810.17,1881.2 cw(c770.01,1841.03) 826.81,1841.03 cw(c883.61,1841.03) P4.1@843.45,1881.2 ; P4.1@813,1884.03 cw(c779.67,1850.69) 826.81,1850.69 cw(c873.95,1850.69) P4.1@840.62,1884.03 ; P4.1@815.83,1886.85 cw(c789.32,1860.35) 826.81,1860.35 cw(c864.3,1860.35) P4.1@837.79,1886.85 ; P4.1@826.81,1897.83 826.81,1724.37 834.65,1716.54 1559.06,1716.54 1580,1695.59 1580,1072.13 v1(1562.99,1055.12) ; v1@1562.99,1061.05 ccw(c1562.99,1075.37) 1573.12,1065.25 ccw(c1583.25,1055.12) v1@1568.93,1055.12
PTB5: OLED1.2 U1.G9 | length 1229
  Top Layer w4: v1@1522.12,1049.38 cw(c1516.59,1028.27) U1.G9@1535.48,1039.18 ; v1@1523.13,1053.25 cw(c1520,1041.31) 1530.69,1047.48 ; v1@1523.62,1049.19 cw(c1523.62,1034.86) 1533.75,1044.99 cw(c1543.88,1055.12) v1@1529.55,1055.12 ; v1(1523.62,1055.12) U1.G9@1543.31,1035.43 ; v1@1525.49,1055.61 ccw(c1537.43,1058.74) 1531.26,1048.05 ; v1@1525.59,1049.52 cw(c1526.97,1045.58) 1530.58,1047.67 ; v1@1529.22,1053.15 ccw(c1533.16,1051.77) 1531.07,1048.16 ; v1@1529.36,1056.62 ccw(c1550.47,1062.15) U1.G9@1539.56,1043.26 ; U1.G9@1535.46,1035.43 ccw(c1516.53,1035.43) 1529.92,1048.82 ccw(c1543.31,1062.21) U1.G9@1543.31,1043.28 ; v1@1525.16,1049.39 cw(c1526.83,1043.15) 1530.06,1048.74 ccw(c1526.83,1043.15) v1@1525.16,1049.39 ; v1@1529.35,1053.58 ccw(c1535.59,1051.91) 1530,1048.68 cw(c1535.59,1051.91) v1@1529.35,1053.58
  Bottom Layer w4: OLED1.2@1337.85,1602.23 cw(c1294.03,1557) 1357,1557 ; OLED1.2@1340.63,1605.1 cw(c1303.18,1566.45) 1357,1566.45 cw(c1410.82,1566.45) OLED1.2@1373.37,1605.1 ; OLED1.2@1343.41,1607.98 cw(c1312.33,1575.89) 1357,1575.89 cw(c1401.67,1575.89) OLED1.2@1370.59,1607.98 ; OLED1.2@1346.2,1610.85 cw(c1321.48,1585.34) 1357,1585.34 cw(c1392.52,1585.34) OLED1.2@1367.8,1610.85 ; OLED1.2@1357,1622 1357,1557 ; OLED1.2@1376.15,1602.23 ccw(c1419.97,1557) 1357,1557 ; v1@1519.43,1059.31 ccw(c1509.3,1069.44) 1523.62,1069.44 ccw(c1537.95,1069.44) v1@1527.82,1059.31 ; v1(1523.62,1055.12) 1523.62,1542.32 1514.76,1551.18 1362.82,1551.18 1357,1557
PTB6: OLED1.3 U1.F12 | length 1064.1
  Top Layer w4: OLED1.3@1237.54,1602.54 cw(c1190.54,1555.54) 1257,1555.54 cw(c1323.46,1555.54) OLED1.3@1276.46,1602.54 ; OLED1.3@1240.36,1605.36 cw(c1200.2,1565.2) 1257,1565.2 cw(c1313.8,1565.2) OLED1.3@1273.64,1605.36 ; OLED1.3@1243.19,1608.19 cw(c1209.86,1574.86) 1257,1574.86 cw(c1304.14,1574.86) OLED1.3@1270.81,1608.19 ; OLED1.3@1246.02,1611.02 cw(c1219.51,1584.51) 1257,1584.51 cw(c1294.49,1584.51) OLED1.3@1267.98,1611.02 ; OLED1.3@1257,1622 1257,1546 1262.65,1540.35 1496.65,1540.35 1503.94,1533.06 U1.F12@1503.94,1153.54 ; U1.F12@1498.39,1159.09 ccw(c1485,1172.48) 1503.94,1172.48 ccw(c1522.87,1172.48) U1.F12@1509.48,1159.09
PTB7: OLED1.4 U1.F11 | length 1193.5
  Top Layer w4: OLED1.4@1137.54,1602.54 cw(c1090.54,1555.54) 1157,1555.54 cw(c1223.46,1555.54) OLED1.4@1176.46,1602.54 ; OLED1.4@1140.36,1605.36 cw(c1100.2,1565.2) 1157,1565.2 cw(c1213.8,1565.2) OLED1.4@1173.64,1605.36 ; OLED1.4@1143.19,1608.19 cw(c1109.86,1574.86) 1157,1574.86 cw(c1204.14,1574.86) OLED1.4@1170.81,1608.19 ; OLED1.4@1146.02,1611.02 cw(c1119.51,1584.51) 1157,1584.51 cw(c1194.49,1584.51) OLED1.4@1167.98,1611.02 ; OLED1.4@1157,1622 1157,1528 1162.36,1522.64 1479.36,1522.64 1484.25,1517.75 1484.25,1133.86 U1.F11@1503.94,1114.17 ; U1.F11@1496.09,1114.17 ccw(c1477.16,1114.17) 1490.55,1127.56 ccw(c1503.94,1140.95) U1.F11@1503.94,1122.02
PTB8: OLED1.5 U1.F10 | length 1456.7
  Top Layer w4: v1@1482.75,1088.75 cw(c1477.22,1067.64) U1.F10@1496.11,1078.55 ; v1@1483.76,1092.62 cw(c1480.63,1080.68) 1491.32,1086.85 ; v1@1484.25,1088.56 cw(c1484.25,1074.23) 1494.38,1084.36 cw(c1504.51,1094.49) v1@1490.18,1094.49 ; v1(1484.25,1094.49) U1.F10@1503.94,1074.8 ; v1@1486.12,1094.98 ccw(c1498.06,1098.11) 1491.89,1087.42 ; v1@1486.22,1088.89 cw(c1487.6,1084.95) 1491.21,1087.04 ; v1@1489.85,1092.52 ccw(c1493.79,1091.14) 1491.7,1087.53 ; v1@1489.99,1095.99 ccw(c1511.1,1101.52) U1.F10@1500.19,1082.63 ; U1.F10@1496.09,1074.8 ccw(c1477.16,1074.8) 1490.55,1088.19 ccw(c1503.94,1101.58) U1.F10@1503.94,1082.65 ; v1@1485.79,1088.76 cw(c1487.46,1082.52) 1490.69,1088.11 ccw(c1487.46,1082.52) v1@1485.79,1088.76 ; v1@1489.98,1092.95 ccw(c1496.22,1091.28) 1490.63,1088.06 cw(c1496.22,1091.28) v1@1489.98,1092.95
  Bottom Layer w4: OLED1.5@1037.54,1602.54 cw(c990.54,1555.54) 1057,1555.54 cw(c1123.46,1555.54) OLED1.5@1076.46,1602.54 ; OLED1.5@1040.36,1605.36 cw(c1000.2,1565.2) 1057,1565.2 cw(c1113.8,1565.2) OLED1.5@1073.64,1605.36 ; OLED1.5@1043.19,1608.19 cw(c1009.86,1574.86) 1057,1574.86 cw(c1104.14,1574.86) OLED1.5@1070.81,1608.19 ; OLED1.5@1046.02,1611.02 cw(c1019.51,1584.51) 1057,1584.51 cw(c1094.49,1584.51) OLED1.5@1067.98,1611.02 ; OLED1.5@1057,1622 1057,1546 1068.55,1534.45 1473.55,1534.45 1484.25,1523.75 v1(1484.25,1094.49) ; v1@1480.06,1098.68 ccw(c1469.93,1108.81) 1484.25,1108.81 ccw(c1498.58,1108.81) v1@1488.45,1098.68
PTB20: PMOD2.1 U1.D10 | length 2520.6
  Top Layer w4: v1@1404.01,1088.75 cw(c1398.48,1067.64) U1.D10@1417.37,1078.55 ; v1@1405.02,1092.62 cw(c1401.89,1080.68) 1412.58,1086.85 ; v1@1405.51,1088.56 cw(c1405.51,1074.23) 1415.64,1084.36 cw(c1425.77,1094.49) v1@1411.44,1094.49 ; v1(1405.51,1094.49) U1.D10@1425.2,1074.8 ; v1@1407.38,1094.98 ccw(c1419.32,1098.11) 1413.15,1087.42 ; v1@1407.48,1088.89 cw(c1408.86,1084.95) 1412.47,1087.04 ; v1@1411.11,1092.52 ccw(c1415.05,1091.14) 1412.96,1087.53 ; v1@1411.25,1095.99 ccw(c1432.36,1101.52) U1.D10@1421.45,1082.63 ; U1.D10@1417.35,1074.8 ccw(c1398.42,1074.8) 1411.81,1088.19 ccw(c1425.2,1101.58) U1.D10@1425.2,1082.65 ; v1@1407.05,1088.76 cw(c1408.72,1082.52) 1411.94,1088.11 ccw(c1408.72,1082.52) v1@1407.05,1088.76 ; v1@1411.24,1092.95 ccw(c1417.48,1091.28) 1411.89,1088.06 cw(c1417.48,1091.28) v1@1411.24,1092.95
  Bottom Layer w4: PMOD2.1@126.64,2023.2 ccw(c119.03,2040.35) 137.8,2040.35 ; PMOD2.1@128.26,2019.54 ccw(c121.75,2034.2) 137.8,2034.2 ccw(c153.84,2034.2) PMOD2.1@147.33,2019.54 ; PMOD2.1@129.88,2015.88 ccw(c124.48,2028.05) 137.8,2028.05 ccw(c151.11,2028.05) PMOD2.1@145.71,2015.88 ; PMOD2.1@137.8,1998.03 137.8,2040.35 ; PMOD2.1@148.96,2023.2 cw(c156.56,2040.35) 137.8,2040.35 ; v1@1399.58,1094.49 ccw(c1385.26,1094.49) 1395.38,1104.62 ccw(c1405.51,1114.74) v1@1405.51,1100.42 ; v1(1405.51,1094.49) 1391.58,1108.42 1391.58,1217.58 1411.26,1237.26 1411.26,1328.74 1295.12,1444.88 693.12,1444.88 690.94,1447.06 690.94,2049.06 687.83,2052.17 149.61,2052.17 137.8,2040.35
PTB21: PMOD2.4 U1.D9 | length 2366.8
  Top Layer w4: v1@1404.01,1049.38 cw(c1398.48,1028.27) U1.D9@1417.37,1039.18 ; v1@1405.02,1053.25 cw(c1401.89,1041.31) 1412.58,1047.48 ; v1@1405.51,1049.19 cw(c1405.51,1034.86) 1415.64,1044.99 cw(c1425.77,1055.12) v1@1411.44,1055.12 ; v1(1405.51,1055.12) U1.D9@1425.2,1035.43 ; v1@1407.38,1055.61 ccw(c1419.32,1058.74) 1413.15,1048.05 ; v1@1407.48,1049.52 cw(c1408.86,1045.58) 1412.47,1047.67 ; v1@1411.11,1053.15 ccw(c1415.05,1051.77) 1412.96,1048.16 ; v1@1411.25,1056.62 ccw(c1432.36,1062.15) U1.D9@1421.45,1043.26 ; U1.D9@1417.35,1035.43 ccw(c1398.42,1035.43) 1411.81,1048.82 ccw(c1425.2,1062.21) U1.D9@1425.2,1043.28 ; v1@1407.05,1049.39 cw(c1408.72,1043.15) 1411.94,1048.74 ccw(c1408.72,1043.15) v1@1407.05,1049.39 ; v1@1411.24,1053.58 ccw(c1417.48,1051.91) 1411.89,1048.68 cw(c1417.48,1051.91) v1@1411.24,1053.58
  Bottom Layer w4: PMOD2.4@418.33,1978.57 cw(c371.34,1931.57) 437.8,1931.57 cw(c504.25,1931.57) PMOD2.4@457.26,1978.57 ; PMOD2.4@421.16,1981.4 cw(c380.99,1941.23) 437.8,1941.23 cw(c494.6,1941.23) PMOD2.4@454.43,1981.4 ; PMOD2.4@423.99,1984.22 cw(c390.65,1950.89) 437.8,1950.89 cw(c484.94,1950.89) PMOD2.4@451.6,1984.22 ; PMOD2.4@426.82,1987.05 cw(c400.31,1960.54) 437.8,1960.54 cw(c475.28,1960.54) PMOD2.4@448.77,1987.05 ; PMOD2.4@437.8,1998.03 437.8,1906.2 441.32,1902.69 662.32,1902.69 666.34,1898.66 666.34,1439.66 669.98,1436.02 1289.98,1436.02 1401.57,1324.43 1401.57,1246.57 1383,1228 1383,1077.63 v1(1405.51,1055.12) ; v1@1399.58,1055.12 ccw(c1385.26,1055.12) 1395.38,1065.25 ccw(c1405.51,1075.37) v1@1405.51,1061.05
PTB22: PMOD2.3 U1.C12 | length 2227
  Top Layer w4: U1.C12@1380.28,1159.09 ccw(c1366.89,1172.48) 1385.83,1172.48 ccw(c1404.76,1172.48) U1.C12@1391.37,1159.09 ; v1@1381.63,1283.98 cw(c1371.5,1273.85) 1385.83,1273.85 cw(c1400.15,1273.85) v1@1390.02,1283.98 ; U1.C12@1385.83,1153.54 v1(1385.83,1288.17)
  Bottom Layer w4: PMOD2.3@318.33,1978.57 cw(c271.34,1931.57) 337.8,1931.57 cw(c404.25,1931.57) PMOD2.3@357.26,1978.57 ; PMOD2.3@321.16,1981.4 cw(c280.99,1941.23) 337.8,1941.23 cw(c394.6,1941.23) PMOD2.3@354.43,1981.4 ; PMOD2.3@323.99,1984.22 cw(c290.65,1950.89) 337.8,1950.89 cw(c384.94,1950.89) PMOD2.3@351.6,1984.22 ; PMOD2.3@326.82,1987.05 cw(c300.31,1960.54) 337.8,1960.54 cw(c375.28,1960.54) PMOD2.3@348.77,1987.05 ; PMOD2.3@337.8,1998.03 337.8,1894.2 341.25,1890.75 651.25,1890.75 654.53,1887.47 654.53,1433.47 661.82,1426.18 1285.82,1426.18 1385.83,1326.17 v1(1385.83,1288.17) ; v1@1381.63,1292.37 ccw(c1371.5,1302.5) 1385.83,1302.5 ccw(c1400.15,1302.5) v1@1390.02,1292.37
PTB23: PMOD2.2 U1.C11 | length 2449.3
  Top Layer w4: v1@1364.64,1128.12 cw(c1359.11,1107.01) U1.C11@1378,1117.92 ; v1@1365.65,1131.99 cw(c1362.52,1120.05) 1373.21,1126.22 ; v1@1366.14,1127.93 cw(c1366.14,1113.6) 1376.27,1123.73 cw(c1386.4,1133.86) v1@1372.07,1133.86 ; v1(1366.14,1133.86) U1.C11@1385.83,1114.17 ; v1@1368.01,1134.35 ccw(c1379.95,1137.48) 1373.78,1126.79 ; v1@1368.11,1128.26 cw(c1369.49,1124.32) 1373.1,1126.41 ; v1@1371.74,1131.89 ccw(c1375.68,1130.51) 1373.59,1126.9 ; v1@1371.88,1135.36 ccw(c1392.99,1140.89) U1.C11@1382.08,1122 ; U1.C11@1377.98,1114.17 ccw(c1359.05,1114.17) 1372.44,1127.56 ccw(c1385.83,1140.95) U1.C11@1385.83,1122.02 ; v1@1367.68,1128.13 cw(c1369.35,1121.89) 1372.58,1127.48 ccw(c1369.35,1121.89) v1@1367.68,1128.13 ; v1@1371.87,1132.32 ccw(c1378.11,1130.65) 1372.52,1127.43 cw(c1378.11,1130.65) v1@1371.87,1132.32
  Bottom Layer w4: PMOD2.2@218.33,1978.57 cw(c171.34,1931.57) 237.8,1931.57 cw(c304.25,1931.57) PMOD2.2@257.26,1978.57 ; PMOD2.2@221.16,1981.4 cw(c180.99,1941.23) 237.8,1941.23 cw(c294.6,1941.23) PMOD2.2@254.43,1981.4 ; PMOD2.2@223.99,1984.22 cw(c190.65,1950.89) 237.8,1950.89 cw(c284.94,1950.89) PMOD2.2@251.6,1984.22 ; PMOD2.2@226.82,1987.05 cw(c200.31,1960.54) 237.8,1960.54 cw(c275.28,1960.54) PMOD2.2@248.77,1987.05 ; PMOD2.2@237.8,1998.03 237.8,1880.2 241.03,1876.97 634.03,1876.97 637.8,1873.2 637.8,1425.2 645.68,1417.32 1281.68,1417.32 1366.14,1332.86 v1(1366.14,1133.86) ; v1@1361.95,1138.05 ccw(c1351.82,1148.18) 1366.14,1148.18 ccw(c1380.47,1148.18) v1@1370.34,1138.05
PTC3: S1.1 U1.A11 | length 1634.7
  Top Layer w4: S1.1@640.39,550.2 673.23,550.2 ; S1.1@655.39,542.98 cw(c666.86,537.46) 666.86,550.2 cw(c666.86,562.93) S1.1@655.39,557.41 ; S1.1@658.99,541.25 cw(c673.23,534.4) 673.23,550.2 ; S1.1@658.99,559.15 ccw(c673.23,566) 673.23,550.2 ; U1.A11@1301.54,1108.63 ccw(c1288.15,1095.24) 1288.15,1114.17 ccw(c1288.15,1133.11) U1.A11@1301.54,1119.72 ; U1.A11@1307.09,1114.17 1120.17,1114.17 1113.19,1107.19 1113.19,396.65 1102.36,385.83 687.01,385.83 680.12,392.72 680.12,543.31 673.23,550.2
PTC12: SW2.5 U1.A7 | length 845.7
  Top Layer w4: 1165.23,423.03 cw(c1165.23,399.24) SW2.5@1182.05,416.06 ; 1165.38,423.03 ccw(c1165.38,446.61) SW2.5@1182.05,429.94 ; 1174.89,423.03 cw(c1174.89,408.89) SW2.5@1184.88,418.89 ; 1175.04,423.03 ccw(c1175.04,436.95) SW2.5@1184.88,427.11 ; SW2.5@1220.49,423 1161.61,423.03 1145.19,439.46 1145.19,948.93 1152.95,956.69 U1.A7@1307.09,956.69 ; U1.A7@1301.54,951.15 ccw(c1288.15,937.76) 1288.15,956.69 ccw(c1288.15,975.63) U1.A7@1301.54,962.24
PTC13: R4.2 R5.2 U1.D6 | length 1869
  Top Layer w4: U1.D6@1425.2,917.32 v1(1444.88,937.01) ; U1.D6@1425.2,925.17 ccw(c1425.2,944.1) 1438.58,930.71 ccw(c1451.97,917.32) U1.D6@1433.04,917.32 ; U1.D6@1428.95,925.15 ccw(c1418.04,944.04) v1@1439.14,938.51 ; U1.D6@1433.02,921.07 cw(c1451.91,910.16) v1@1446.39,931.27 ; 1437.24,929.94 ccw(c1431.07,940.63) v1@1443.01,937.5 ; 1437.43,930.05 ccw(c1435.35,933.66) v1@1439.28,935.04 ; 1437.81,929.37 cw(c1448.5,923.2) v1@1445.37,935.14 ; 1437.92,929.56 cw(c1441.53,927.47) v1@1442.92,931.41 ; v1@1438.95,937.01 cw(c1424.63,937.01) 1434.75,926.88 cw(c1444.88,916.75) v1@1444.88,931.07 ; 1438.45,930.63 cw(c1441.68,925.04) 1443.35,931.28 ccw(c1441.68,925.04) 1438.45,930.63 ; 1438.51,930.58 ccw(c1432.92,933.8) 1439.15,935.47 cw(c1432.92,933.8) 1438.51,930.58
  Bottom Layer w4: R5.2@564.1,1484.37 cw(c540.63,1460.9) 573.82,1460.9 cw(c607.01,1460.9) R5.2@583.54,1484.37 ; R5.2@564.1,1507.75 ccw(c540.63,1531.22) 573.82,1531.22 ccw(c607.01,1531.22) R5.2@583.54,1507.75 ; R4.2@564.1,1548.35 cw(c540.63,1524.88) 573.82,1524.88 cw(c607.01,1524.88) R4.2@583.54,1548.35 ; R5.2@566.93,1487.2 cw(c550.29,1470.56) 573.82,1470.56 cw(c597.35,1470.56) R5.2@580.71,1487.2 ; R5.2@566.93,1504.92 ccw(c550.29,1521.57) 573.82,1521.57 ccw(c597.35,1521.57) R5.2@580.71,1504.92 ; R4.2@566.93,1551.18 cw(c550.28,1534.54) 573.82,1534.54 cw(c597.35,1534.54) R4.2@580.71,1551.18 ; R4.2@573.82,1558.07 573.82,1411.18 578,1407 1278,1407 1351,1334 1351,1081.57 1400.57,1032 1437,1032 1444.88,1024.12 v1(1444.88,937.01) ; v1@1440.69,941.2 ccw(c1430.56,951.33) 1444.88,951.33 ccw(c1459.21,951.33) v1@1449.08,941.2
PTC14: S2.1 U1.C6 | length 2024.7
  Top Layer w4: S2.1@638.43,376.84 1109.13,376.84 1121.19,388.91 1121.19,1087.19 1128.49,1094.49 v1(1326.77,1094.49) v1@1327,1094.49 ; S2.1@644.53,385.04 ccw(c664.34,404.85) 664.34,376.84 ; S2.1@647.36,370 cw(c663.88,353.48) 663.88,376.84 ; S2.1@647.36,387.87 ccw(c673.99,414.5) 673.99,376.84 ; S2.1@650.19,367.17 cw(c673.54,343.83) 673.54,376.84 ; S2.1@650.19,390.7 ccw(c683.65,424.16) 683.65,376.84 ; S2.1@653.02,364.34 cw(c683.19,334.17) 683.19,376.84 ; S2.1@653.02,393.53 ccw(c693.31,433.82) 693.31,376.84 ; v1@1322.58,1090.29 ccw(c1312.45,1080.16) 1312.45,1094.49 ccw(c1312.45,1108.81) v1@1322.58,1098.68 ; U1.C6@1385.83,917.32 v1(1405.51,937.01) ; U1.C6@1385.83,925.17 ccw(c1385.83,944.1) 1399.21,930.71 ccw(c1412.6,917.32) U1.C6@1393.67,917.32 ; U1.C6@1389.58,925.15 ccw(c1378.67,944.04) v1@1399.77,938.51 ; U1.C6@1393.65,921.07 cw(c1412.55,910.16) v1@1407.02,931.27 ; 1397.87,929.94 ccw(c1391.7,940.63) v1@1403.64,937.5 ; 1398.06,930.05 ccw(c1395.98,933.66) v1@1399.91,935.04 ; 1398.44,929.37 cw(c1409.13,923.2) v1@1406,935.14 ; 1398.55,929.56 cw(c1402.16,927.47) v1@1403.55,931.41 ; v1@1399.58,937.01 cw(c1385.26,937.01) 1395.38,926.88 cw(c1405.51,916.75) v1@1405.51,931.07 ; 1399.08,930.63 cw(c1402.31,925.04) 1403.98,931.28 ccw(c1402.31,925.04) 1399.08,930.63 ; 1399.14,930.57 ccw(c1393.55,933.8) 1399.78,935.47 cw(c1393.55,933.8) 1399.14,930.57
  Bottom Layer w4: v1@1323.09,1089.84 cw(c1317.07,1082.23) 1326.77,1082.23 ; v1(1326.77,1094.49) 1326.77,1082.23 ; v1@1330.45,1089.84 ccw(c1336.47,1082.23) 1326.77,1082.23 ; v1@1401.32,941.2 ccw(c1391.19,951.33) 1405.51,951.33 ccw(c1419.84,951.33) v1@1409.71,941.2 ; v1(1405.51,937.01) 1405.51,972.49 1385,993 1385,1024 1326.77,1082.23
PTC15: SW2.6 U1.B6 | length 756.4
  Top Layer w4: 1176.36,473.03 cw(c1176.36,462.27) SW2.6@1184.56,469.24 ; 1176.42,473.03 ccw(c1176.42,483.79) SW2.6@1184.58,476.78 ; SW2.6@1181.51,466.65 ccw(c1167.72,454.93) 1167.72,473.03 ; SW2.6@1181.55,479.39 cw(c1167.72,491.25) 1167.72,473.03 ; SW2.6@1220.49,473 1167.72,473.03 ; U1.B6@1338.61,917.32 cw(c1319.68,917.32) 1333.07,903.93 cw(c1346.46,890.55) U1.B6@1346.46,909.48 ; U1.B6@1346.46,917.32 1326.13,897 1164.53,897 1154.53,887 1154.53,486.22 1167.72,473.03
PTC18: SW2.8 U1.C5 | length 702.3
  Top Layer w4: SW2.8@1213.55,579.94 ccw(c1196.08,597.41) 1220.79,597.41 ; SW2.8@1216.38,577.11 ccw(c1205.74,587.75) 1220.79,587.75 ; v1@1216.59,625.02 cw(c1206.46,614.89) 1220.79,614.89 cw(c1235.11,614.89) v1@1224.98,625.02 ; SW2.8@1220.79,573 v1(1220.79,629.21) ; 1220.79,586.31 ccw(c1233.79,586.31) SW2.8@1224.6,577.11 ; 1220.79,595.96 ccw(c1243.45,595.96) SW2.8@1227.43,579.94 ; U1.C5@1385.83,870.11 cw(c1385.83,851.18) 1399.21,864.56 cw(c1412.6,877.95) U1.C5@1393.67,877.95 ; U1.C5@1385.83,877.95 v1(1405.51,858.27) ; U1.C5@1389.58,870.13 cw(c1378.67,851.23) v1@1399.77,856.76 ; U1.C5@1393.65,874.2 ccw(c1412.55,885.11) v1@1407.02,864.01 ; 1397.87,865.34 cw(c1391.7,854.65) v1@1403.64,857.78 ; 1398.06,865.23 cw(c1395.98,861.62) v1@1399.91,860.23 ; 1398.44,865.91 ccw(c1409.13,872.08) v1@1406,860.14 ; 1398.55,865.72 ccw(c1402.16,867.8) v1@1403.55,863.87 ; v1@1399.58,858.27 ccw(c1385.26,858.27) 1395.38,868.4 ccw(c1405.51,878.52) v1@1405.51,864.2 ; 1399.08,864.64 ccw(c1402.31,870.23) 1403.98,864 cw(c1402.31,870.23) 1399.08,864.64 ; 1399.14,864.7 cw(c1393.55,861.47) 1399.78,859.8 ccw(c1393.55,861.47) 1399.14,864.7
  Bottom Layer w4: v1(1220.79,629.21) 1229.24,637.67 ; v1@1221.59,635.09 ccw(c1222.82,644.09) 1229.24,637.67 ; v1@1226.67,630.02 cw(c1235.67,631.24) 1229.24,637.67 ; 1394.85,846.85 ccw(c1383.43,858.27) v1@1399.58,858.27 ; 1396.67,848.67 cw(c1405.51,839.84) v1@1405.51,852.33 ; v1(1405.51,858.27) 1405.51,857.51 1327,779 1327,644 1320.67,637.67 1229.24,637.67
PTC19: SW2.7 U1.B5 | length 617.5
  Top Layer w4: SW2.7@1180.27,518.5 ccw(c1172.84,514.66) 1172.84,523.03 ; SW2.7@1180.3,527.55 cw(c1172.84,531.46) 1172.84,523.03 ; SW2.7@1220.49,523 1172.83,523.03 ; U1.B5@1338.61,877.95 cw(c1319.68,877.95) 1333.07,864.56 cw(c1346.46,851.18) U1.B5@1346.46,870.11 ; U1.B5@1346.46,877.95 1326.5,858 1175.05,858 1165.35,848.3 1165.35,530.51 1172.83,523.03
PTD7: P2.1 U1.A1 | length 1464.2
  Top Layer w4: v1(1017,330.55) 1300.55,330.55 1307.09,337.09 U1.A1@1307.09,720.47 ; v1@1021.2,326.36 cw(c1031.32,316.23) 1031.32,330.55 cw(c1031.32,344.87) v1@1021.2,334.75 ; U1.A1@1301.54,714.93 cw(c1288.15,701.54) 1307.09,701.54 cw(c1326.02,701.54) U1.A1@1312.63,714.93
  Bottom Layer w4: P2.1@826.81,97.83 875.98,147.01 875.98,317.98 888.55,330.55 v1(1017,330.55) ; P2.1@826.81,113.36 ccw(c826.81,150.85) 853.32,124.34 ccw(c879.83,97.83) P2.1@842.34,97.83 ; P2.1@826.81,117.36 ccw(c826.81,164.51) 860.15,131.17 ccw(c893.48,97.83) P2.1@846.34,97.83 ; P2.1@826.81,121.36 ccw(c826.81,178.16) 866.97,138 ccw(c907.14,97.83) P2.1@850.34,97.83 ; P2.1@826.81,125.36 ccw(c826.81,191.82) 873.8,144.83 ccw(c920.8,97.83) P2.1@854.34,97.83 ; v1@1012.8,326.36 ccw(c1002.68,316.23) 1002.68,330.55 ccw(c1002.68,344.87) v1@1012.8,334.75
PTD8: P2.2 U1.C9 | length 1777.4
  Top Layer w4: P2.2@807.35,217.3 ccw(c760.35,264.29) 826.81,264.29 ccw(c893.27,264.29) P2.2@846.28,217.3 ; P2.2@810.17,214.47 ccw(c770.01,254.64) 826.81,254.64 ccw(c883.61,254.64) P2.2@843.45,214.47 ; P2.2@813,211.64 ccw(c779.67,244.98) 826.81,244.98 ccw(c873.95,244.98) P2.2@840.62,211.64 ; P2.2@815.83,208.81 ccw(c789.32,235.32) 826.81,235.32 ccw(c864.3,235.32) P2.2@837.79,208.81 ; P2.2@826.81,197.83 826.81,360.81 834.84,368.84 1118.84,368.84 1129.19,379.19 1129.19,1049.19 1136.1,1056.1 1363.69,1056.1 1384.36,1035.43 U1.C9@1385.83,1035.43 ; 1369.93,1049.86 ccw(c1385.83,1065.76) U1.C9@1385.83,1043.28 ; 1373.48,1046.31 cw(c1362.6,1035.43) U1.C9@1377.98,1035.43 ; 1376.76,1043.03 ccw(c1385.83,1052.1) U1.C9@1385.83,1039.28
PTD9: P2.3 U1.B9 | length 1760.4
  Top Layer w4: P2.3@899.28,97.83 ccw(c832.83,97.83) 879.82,144.83 ccw(c926.81,191.82) P2.3@926.81,125.36 ; P2.3@903.28,97.83 ccw(c846.48,97.83) 886.65,138 ccw(c926.81,178.16) P2.3@926.81,121.36 ; P2.3@907.28,97.83 ccw(c860.14,97.83) 893.48,131.17 ccw(c926.81,164.51) P2.3@926.81,117.36 ; P2.3@911.28,97.83 ccw(c873.8,97.83) 900.3,124.34 ccw(c926.81,150.85) P2.3@926.81,113.36 ; P2.3@926.81,97.83 875.98,148.66 875.98,354.98 881.84,360.84 1128.56,360.84 1137.19,369.47 1137.19,1007.19 1144.76,1014.76 1325.79,1014.76 U1.B9@1346.46,1035.43 ; U1.B9@1338.61,1035.43 cw(c1319.68,1035.43) 1333.07,1022.05 cw(c1346.46,1008.66) U1.B9@1346.46,1027.59
PTD10: P2.4 U1.B3 | length 1371.9
  Top Layer w4: P2.4@907.35,217.3 ccw(c860.35,264.29) 926.81,264.29 ccw(c993.27,264.29) P2.4@946.28,217.3 ; P2.4@910.17,214.47 ccw(c870.01,254.64) 926.81,254.64 ccw(c983.61,254.64) P2.4@943.45,214.47 ; P2.4@913,211.64 ccw(c879.67,244.98) 926.81,244.98 ccw(c973.95,244.98) P2.4@940.62,211.64 ; P2.4@915.83,208.81 ccw(c889.32,235.32) 926.81,235.32 ccw(c964.3,235.32) P2.4@937.79,208.81 ; P2.4@926.81,197.83 926.81,348.81 930.84,352.84 1266.23,352.84 1278,364.61 1278,618 1264.07,631.93 1264.07,772.07 1271.53,779.53 1326.77,779.53 U1.B3@1346.46,799.21 ; U1.B3@1338.61,799.21 cw(c1319.68,799.21) 1333.07,785.82 cw(c1346.46,772.44) U1.B3@1346.46,791.37
PTD11: P2.5 U1.B2 | length 1380.6
  Top Layer w4: P2.5@999.28,97.83 ccw(c932.83,97.83) 979.82,144.83 ccw(c1026.81,191.82) P2.5@1026.81,125.36 ; P2.5@1003.28,97.83 ccw(c946.48,97.83) 986.65,138 ccw(c1026.81,178.16) P2.5@1026.81,121.36 ; P2.5@1007.28,97.83 ccw(c960.14,97.83) 993.48,131.17 ccw(c1026.81,164.51) P2.5@1026.81,117.36 ; P2.5@1011.28,97.83 ccw(c973.8,97.83) 1000.3,124.34 ccw(c1026.81,150.85) P2.5@1026.81,113.36 ; P2.5@1026.81,97.83 976,148.65 976,333 987.48,344.48 1279.48,344.48 1288,353 1288,730 1298,740 1326.61,740 U1.B2@1346.46,759.84 ; U1.B2@1338.61,759.84 cw(c1319.68,759.84) 1333.07,746.45 cw(c1346.46,733.07) U1.B2@1346.46,752
PTD12: P2.6 U1.B1 | length 1174.2
  Top Layer w4: P2.6@1007.35,217.3 ccw(c960.35,264.29) 1026.81,264.29 ccw(c1093.27,264.29) P2.6@1046.28,217.3 ; P2.6@1010.17,214.47 ccw(c970.01,254.64) 1026.81,254.64 ccw(c1083.61,254.64) P2.6@1043.45,214.47 ; P2.6@1013,211.64 ccw(c979.67,244.98) 1026.81,244.98 ccw(c1073.95,244.98) P2.6@1040.62,211.64 ; P2.6@1015.83,208.81 ccw(c989.32,235.32) 1026.81,235.32 ccw(c1064.3,235.32) P2.6@1037.79,208.81 ; P2.6@1026.81,197.83 1026.81,308.81 1032.96,314.96 1310.96,314.96 1328.49,332.49 1328.49,702.51 U1.B1@1346.46,720.47 ; U1.B1@1338.61,720.47 cw(c1319.68,720.47) 1333.07,707.08 cw(c1346.46,693.7) U1.B1@1346.46,712.63
PTD13: P2.7 U1.C3 | length 1391.8
  Top Layer w4: P2.7@1126.81,97.83 1169,140.02 ; P2.7@1128.04,113.31 ccw(c1130.31,141.93) 1150.61,121.63 ccw(c1170.9,101.33) P2.7@1142.29,99.06 ; P2.7@1128.36,117.3 ccw(c1131.21,153.29) 1156.74,127.76 ccw(c1182.26,102.23) P2.7@1146.28,99.38 ; P2.7@1128.67,121.29 ccw(c1132.11,164.65) 1162.87,133.89 ccw(c1193.62,103.14) P2.7@1150.26,99.7 ; P2.7@1128.99,125.28 ccw(c1133.01,176.01) 1169,140.02 ; P2.7@1154.25,100.01 cw(c1204.98,104.04) 1169,140.02 ; v1@1361.95,626.66 cw(c1351.82,616.53) 1366.14,616.53 cw(c1380.47,616.53) v1@1370.34,626.66 ; v1@1364.64,785.27 ccw(c1359.11,806.37) U1.C3@1378,795.46 ; v1@1365.65,781.4 ccw(c1362.52,793.34) 1373.21,787.17 ; v1(1366.14,630.86) 1366.14,308.59 1350,292.45 1175.45,292.45 1169,286 1169,140.02 ; v1(1366.14,779.53) U1.C3@1385.83,799.21 ; v1@1366.14,785.46 ccw(c1366.14,799.78) 1376.27,789.66 ccw(c1386.4,779.53) v1@1372.07,779.53 ; v1@1368.01,779.04 cw(c1379.95,775.91) 1373.78,786.6 ; v1@1368.11,785.13 ccw(c1369.49,789.06) 1373.1,786.98 ; v1@1371.74,781.49 cw(c1375.68,782.88) 1373.59,786.49 ; v1@1371.88,778.02 cw(c1392.99,772.49) U1.C3@1382.08,791.39 ; U1.C3@1377.98,799.21 cw(c1359.05,799.21) 1372.44,785.82 cw(c1385.83,772.44) U1.C3@1385.83,791.37 ; v1@1367.68,785.26 ccw(c1369.35,791.49) 1372.57,785.9 cw(c1369.35,791.49) v1@1367.68,785.26 ; v1@1371.87,781.06 cw(c1378.11,782.73) 1372.52,785.96 ccw(c1378.11,782.73) v1@1371.87,781.06
  Bottom Layer w4: v1@1361.95,635.05 ccw(c1351.82,645.18) 1366.14,645.18 ccw(c1380.47,645.18) v1@1370.34,635.05 ; v1@1361.95,775.33 cw(c1351.82,765.2) 1366.14,765.2 cw(c1380.47,765.2) v1@1370.34,775.33 ; v1(1366.14,630.86) v1(1366.14,779.53)